# EAGLE board lion (EAGLE 6.5.0)

Size 100 x 80 mm. Coordinates in mm from the lower left corner, seen from the top.
Outline: 0,0 100,0 100,80 0,80 0,0
Copper layers (1*16): Top 0.035mm / dielectric 1.5mm / Bottom 0.035mm
Design rules "default": minimum track width 10mil, minimum drill 24mil, track to track 8mil, track to pad 8mil, pad to pad 8mil, via to via 8mil, smd to smd 8mil, copper to edge 40mil, drill to drill 8mil, minimum pad ring 10mil, minimum via ring 8mil, stop-mask expansion 4mil, vias tented up to drill 0mil, thermal gap 10mil

## Footprints (pad centres in the part's own frame; a part is rotated, then mirrored left to right if it is on the bottom)
PUSHBTN = drill 0.8 square: P$1 -3.175,-1.905; P$2 -3.175,1.905; P$3 3.175,1.905; P$4 3.175,-1.905
C025-025X050 = drill 0.813 octagon: 1 -1.27,0; 2 1.27,0
DIL40 = drill 0.813 long: 1 -24.13,-7.62; 2 -21.59,-7.62; 3 -19.05,-7.62; 4 -16.51,-7.62; 5 -13.97,-7.62; 6 -11.43,-7.62; 7 -8.89,-7.62; 8 -6.35,-7.62; 9 -3.81,-7.62; 10 -1.27,-7.62; 11 1.27,-7.62; 12 3.81,-7.62; 13 6.35,-7.62; 14 8.89,-7.62; 15 11.43,-7.62; 16 13.97,-7.62; 17 16.51,-7.62; 18 19.05,-7.62; 19 21.59,-7.62; 20 24.13,-7.62; 21 24.13,7.62; 22 21.59,7.62; 23 19.05,7.62; 24 16.51,7.62; 25 13.97,7.62; 26 11.43,7.62; 27 8.89,7.62; 28 6.35,7.62; 29 3.81,7.62; 30 1.27,7.62; 31 -1.27,7.62; 32 -3.81,7.62; 33 -6.35,7.62; 34 -8.89,7.62; 35 -11.43,7.62; 36 -13.97,7.62; 37 -16.51,7.62; 38 -19.05,7.62; 39 -21.59,7.62; 40 -24.13,7.62
0204/5 = drill 0.813 octagon: 1 -2.54,0; 2 2.54,0
USBMINIB = drill 0.8 square: D+ -1.25,5.71; D- -1.25,2.71; GND 1.25,5.71; P$1 6.02,0; P$2 -6.02,0; VPP 1.25,2.71
CRYSTAL = drill 0.8 square: P$1 -2.54,0; P$2 2.54,0
DUBOX3 = drill 0.711 square: P$1 0,0; P$2 2.54,0; P$3 5.08,0
DUBOX6 = drill 0.8 square: P$1 0,0; P$2 2.54,0; P$3 5.08,0; P$4 7.62,0; P$5 10.16,0; P$6 12.7,0
DUBOX8 = drill 0.8 square: P$1 0,0; P$2 2.54,0; P$3 5.08,0; P$4 7.62,0; P$5 10.16,0; P$6 12.7,0; P$7 15.24,0; P$8 17.78,0
DUBOX2 = drill 0.711 square: P$1 0,0; P$2 2.54,0
DUBOX4 = drill 0.711 square: P$1 0,0; P$2 2.54,0; P$3 5.08,0; P$4 7.62,0

## Placement (x,y rotation side)
BUTTON1  PUSHBTN  [PUSHBTN]  13.97,34.29 270 top
C1  18pF  [C025-025X050]  87.63,6.35 0 top
C2  18pF  [C025-025X050]  97.79,6.35 0 top
C3  220nF  [C025-025X050]  95.25,45.72 0 top
IC1  PIC18F4550_40  [DIL40]  52.07,38.1 0 top
R1  1k  [0204/5]  24.13,34.29 90 top
U$1  USBMINIB  [USBMINIB]  88.9,72.39 270 top
U$2  20 Mhz  [CRYSTAL]  58.42,15.24 0 top
U$3  DUBOX3  [DUBOX3]  64.77,17.78 0 top
U$4  DUBOX6  [DUBOX6]  67.31,58.42 180 top
U$5  DUBOX8  [DUBOX8]  44.45,58.42 180 top
U$6  DUBOX2  [DUBOX2]  76.2,16.51 0 top
U$7  DUBOX2  [DUBOX2]  50.8,58.42 180 top
U$8  DUBOX2  [DUBOX2]  76.2,58.42 180 top
U$9  DUBOX4  [DUBOX4]  30.48,17.78 0 top
U$10  DUBOX4  [DUBOX4]  43.18,17.78 0 top

## Library data of the parts
BUTTON1 U$1-U$10 = leonino
C1-C3 R1 = resistor
IC1 = microchip; MF: MICROCHIP; MPN: PIC18F4550-I/P; OC_FARNELL: 9321357; OC_NEWARK: 74K8623

## Nets
N$1: U$1.VPP
N$2: C3.1 IC1.18
N$3: U$1.D+
N$4: C1.1 IC1.13 U$2.P$1
N$5: C2.1 IC1.14 U$2.P$2
N$6: BUTTON1.P$2 C1.2 C2.2 C3.2 IC1.12 U$1.GND
N$7: BUTTON1.P$4 IC1.1 R1.1
N$8: U$1.D-
N$9: IC1.11 R1.2
N$10: IC1.2 U$9.P$1
N$11: IC1.3 U$9.P$2
N$12: IC1.4 U$9.P$3
N$13: IC1.19 U$6.P$1
N$14: IC1.5 U$9.P$4
N$15: IC1.7 U$10.P$1
N$16: IC1.8 U$10.P$2
N$17: IC1.9 U$10.P$3
N$18: IC1.10 U$10.P$4
N$19: IC1.40 U$5.P$8
N$20: IC1.39 U$5.P$7
N$21: IC1.38 U$5.P$6
N$22: IC1.37 U$5.P$5
N$23: IC1.36 U$5.P$4
N$24: IC1.35 U$5.P$3
N$25: IC1.34 U$5.P$2
N$26: IC1.33 U$5.P$1
N$27: IC1.30 U$4.P$6
N$28: IC1.29 U$4.P$5
N$29: IC1.28 U$4.P$4
N$30: IC1.32 U$7.P$2
N$31: IC1.26 U$4.P$2
N$32: IC1.25 U$4.P$1
N$33: IC1.20 U$6.P$2
N$34: IC1.31 U$7.P$1
N$35: IC1.27 U$4.P$3
N$36: IC1.22 U$8.P$2
N$37: IC1.17 U$3.P$3
N$38: IC1.16 U$3.P$2
N$39: IC1.15 U$3.P$1
N$40: IC1.21 U$8.P$1

## Tracks (layer width: path | path; a pad name or v marks a point on that pad's centre or on a via)
N$2  (1 unrouted)
N$4  (2 unrouted)
N$5  (2 unrouted)
N$6  (5 unrouted)
N$7  (2 unrouted)
N$9  (1 unrouted)
N$10  (1 unrouted)
N$11  (1 unrouted)
N$12  (1 unrouted)
N$13  (1 unrouted)
N$14  (1 unrouted)
N$15  (1 unrouted)
N$16  (1 unrouted)
N$17  (1 unrouted)
N$18  (1 unrouted)
N$19  (1 unrouted)
N$20  (1 unrouted)
N$21  (1 unrouted)
N$22  (1 unrouted)
N$23  (1 unrouted)
N$24  (1 unrouted)
N$25  (1 unrouted)
N$26  (1 unrouted)
N$27  (1 unrouted)
N$28  (1 unrouted)
N$29  (1 unrouted)
N$30  (1 unrouted)
N$31  (1 unrouted)
N$32  (1 unrouted)
N$33  (1 unrouted)
N$34  (1 unrouted)
N$35  (1 unrouted)
N$36  (1 unrouted)
N$37  (1 unrouted)
N$38  (1 unrouted)
N$39  (1 unrouted)
N$40  (1 unrouted)